# EAGLE board h2oiq (EAGLE 6.3)
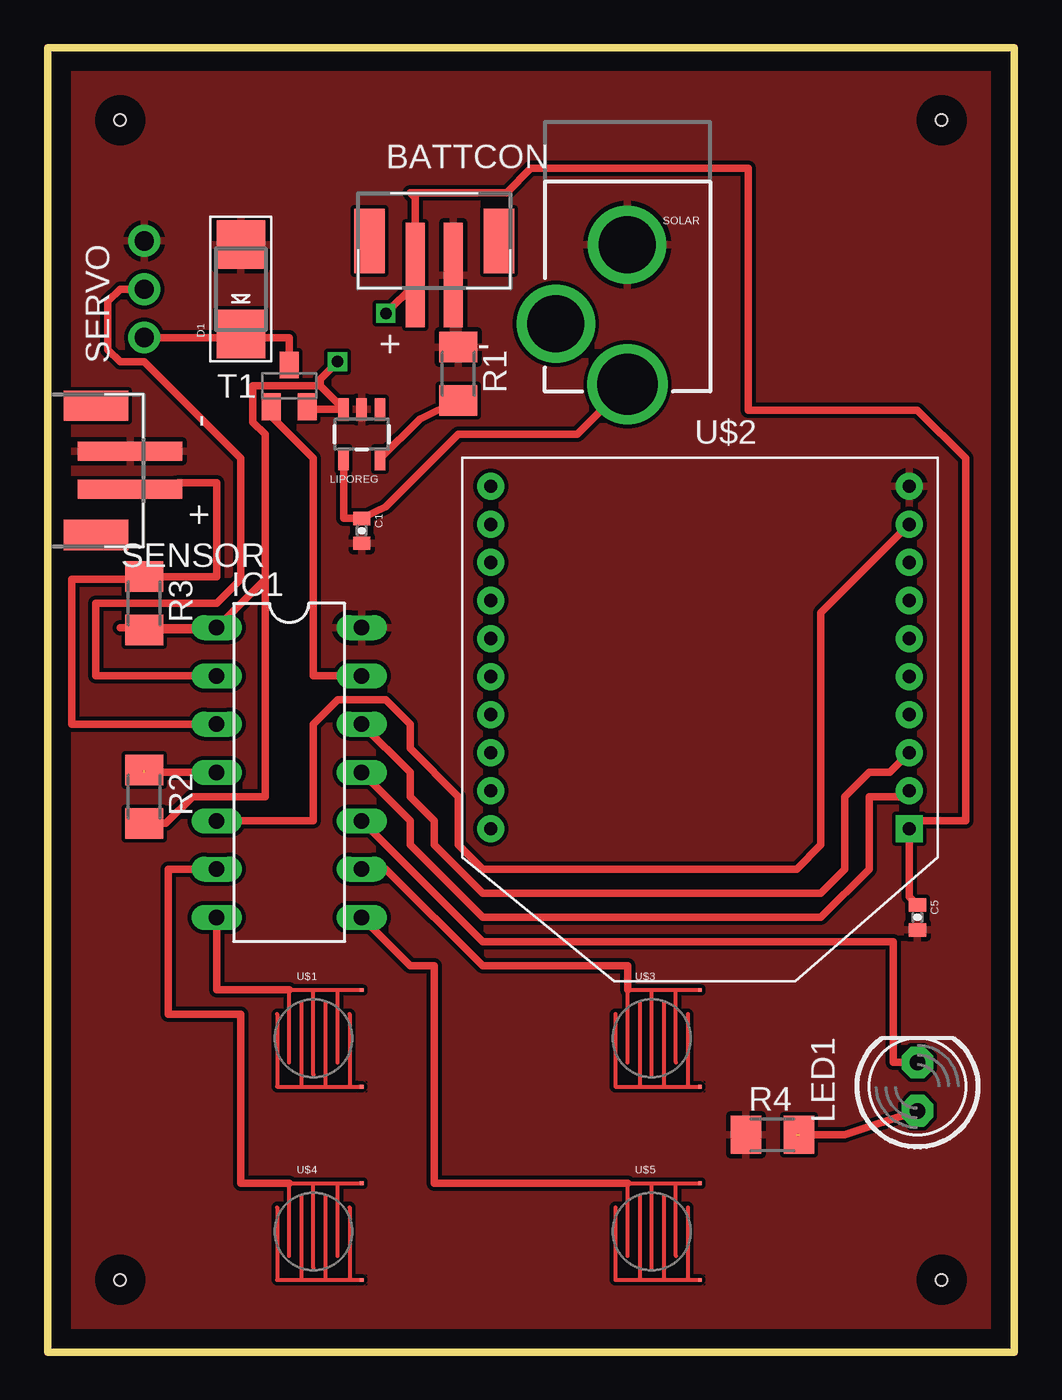
[diagram p0: board, top side]
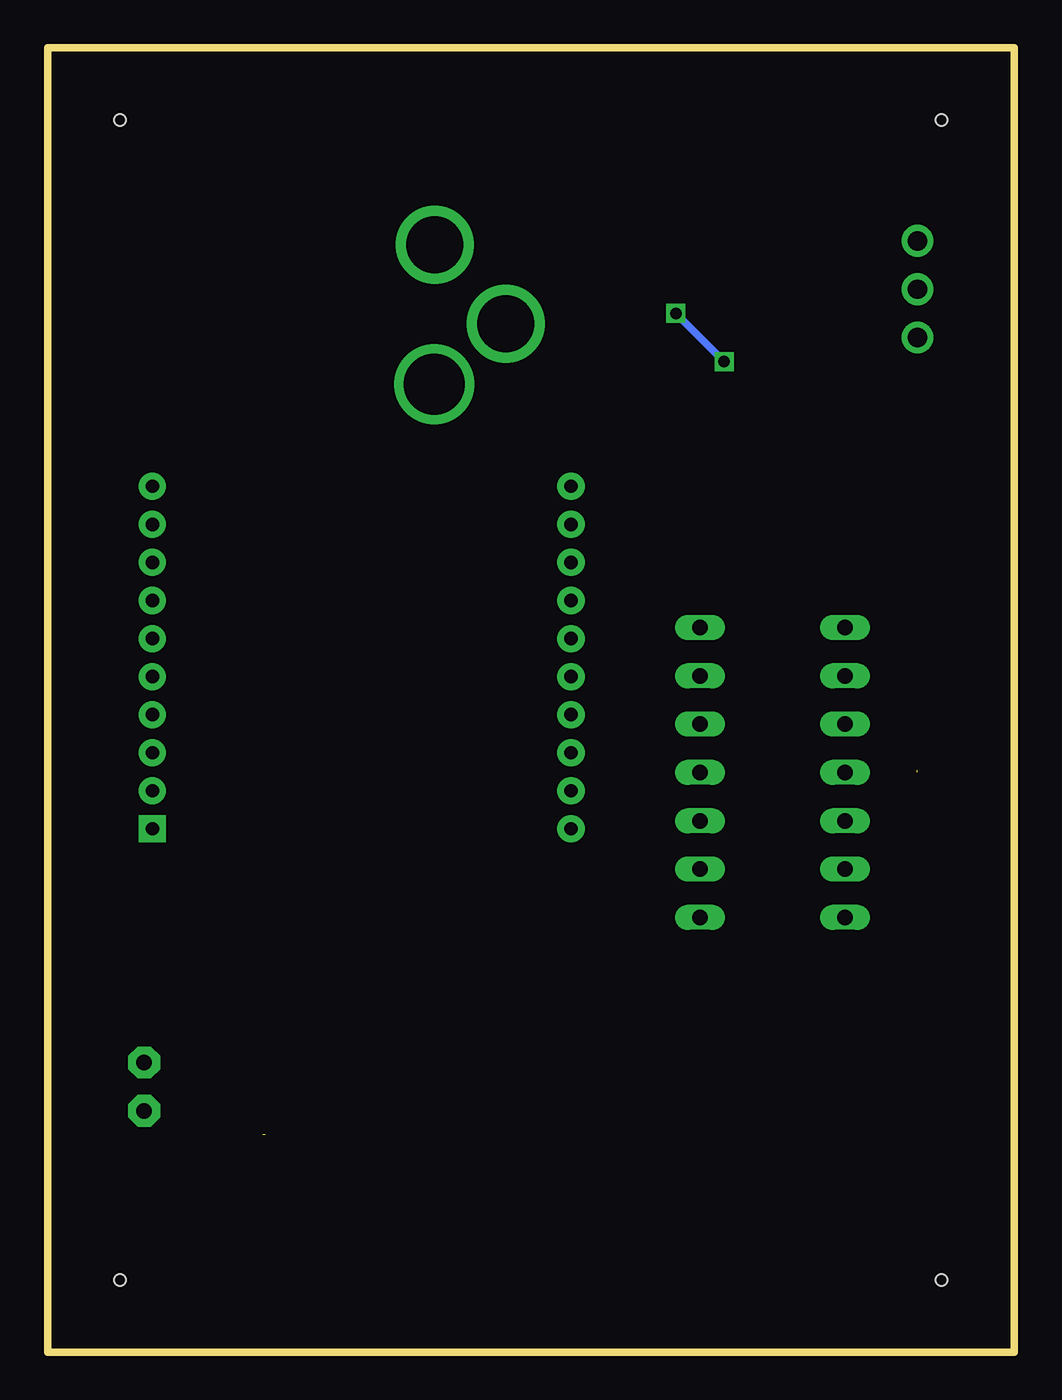
[diagram p1: board, bottom side, seen from below]

Size 50.8 x 68.58 mm. Coordinates in mm from the lower left corner, seen from the top.
Outline: 0,0 50.8,0 50.8,68.58 0,68.58 0,0
Copper layers (1*16): Top 0.035mm / dielectric 1.5mm / Bottom 0.035mm
Design rules "default": minimum track width 10mil, minimum drill 24mil, track to track 8mil, track to pad 8mil, pad to pad 8mil, via to via 8mil, smd to smd 8mil, copper to edge 40mil, drill to drill 8mil, minimum pad ring 10mil, minimum via ring 8mil, stop-mask expansion 4mil, vias tented up to drill 0mil, thermal gap 10mil
Holes 0.6 mm at 3.81,64.77 46.99,64.77 3.81,3.81 46.99,3.81

## Footprints (pad centres in the part's own frame; a part is rotated, then mirrored left to right if it is on the bottom)
JST-PH-2-SMT = smd 1 x 5.5: 1 -1,-1.8; 2 1,-1.8 | smd 1.6 x 3.4: NC1 -3.4,0; NC2 3.4,0
0402-CAP = smd 0.7 x 0.9: 1 -0.65,0; 2 0.65,0
SMADIODE = smd 2.54 x 2.54: A 2.349,0; C -2.349,0
DIL14 = drill 0.813 long: 1 -7.62,-3.81; 2 -5.08,-3.81; 3 -2.54,-3.81; 4 0,-3.81; 5 2.54,-3.81; 6 5.08,-3.81; 7 7.62,-3.81; 8 7.62,3.81; 9 5.08,3.81; 10 2.54,3.81; 11 0,3.81; 12 -2.54,3.81; 13 -5.08,3.81; 14 -7.62,3.81
LED5MM = drill 0.813 pad 1.676 octagon: A -1.27,0; K 1.27,0
SOT23-5 = smd 0.55 x 1.2: 1 -0.95,-1.3; 2 0,-1.3; 3 0.95,-1.3; 4 0.95,1.3; 5 -0.95,1.3
M1206 = smd 1.6 x 2: 1 -1.4,0; 2 1.4,0
1X03-CLEANBIG = drill 1.016 pad 1.676: 1 -2.54,0; 2 0,0; 3 2.54,0
POWER_JACK_PTH_LOCK = drill 2.997 pad 4.115: GND 0.025,6.557; GNDBREAK 3.762,10.7 | drill 3.2 pad 4.115: PWR 0,13.878
SOT23-BEC = smd 1 x 1.4: B -0.95,-1.1; C 0,1.1; E 0.95,-1.1
BUTTON-CONDUCTIVE = smd 0.203 x 0.203: 1 2.54,2.54; 2 2.54,-2.54
XBEE = drill 0.7 pad 1.422 square: 1 -11,5.5 | drill 0.7 pad 1.422: 2 -11,3.5; 3 -11,1.5; 4 -11,-0.5; 5 -11,-2.5; 6 -11,-4.5; 7 -11,-6.5; 8 -11,-8.5; 9 -11,-10.5; 10 -11,-12.5; 11 11,-12.5; 12 11,-10.5; 13 11,-8.5; 14 11,-6.5; 15 11,-4.5; 16 11,-2.5; 17 11,-0.5; 18 11,1.5; 19 11,3.5; 20 11,5.5

## Placement (x,y rotation side)
BATTCON  [JST-PH-2-SMT]  20.32,58.42 0 top
C1  4.7uF  [0402-CAP]  16.51,43.18 270 top
C5  4.7uF  [0402-CAP]  45.72,22.86 270 top
D1  [SMADIODE]  10.16,55.88 90 top
IC1  TINY24/44/84-PU  [DIL14]  12.7,30.48 270 top
LED1  [LED5MM]  45.72,13.97 90 top
LIPOREG  MCP73831  [SOT23-5]  16.51,48.26 180 top
R1  10K  [M1206]  21.59,51.44 270 top
R2  10K  [M1206]  5.08,29.21 270 top
R3  10K  [M1206]  5.08,39.37 270 top
R4  1K  [M1206]  38.1,11.43 0 top
SENSOR  [JST-PH-2-SMT]  2.54,46.35 90 top
SERVO  [1X03-CLEANBIG]  5.08,55.88 90 top
SOLAR  POWER_JACKPTH_LOCK  [POWER_JACK_PTH_LOCK]  30.48,64.77 180 top
T1  [SOT23-BEC]  12.7,50.8 0 top
U$1  BUTTON-CONDUCTIVESMD  [BUTTON-CONDUCTIVE]  13.97,16.51 0 top
U$2  XBEE  [XBEE]  34.29,33.02 180 top
U$3  BUTTON-CONDUCTIVESMD  [BUTTON-CONDUCTIVE]  31.75,16.51 0 top
U$4  BUTTON-CONDUCTIVESMD  [BUTTON-CONDUCTIVE]  13.97,6.35 0 top
U$5  BUTTON-CONDUCTIVESMD  [BUTTON-CONDUCTIVE]  31.75,6.35 0 top

## Library data of the parts
BATTCON D1 LED1 SENSOR SERVO U$2 = adafruit
C1 C5 LIPOREG SOLAR U$1 U$3-U$5 = SparkFun
IC1 = avr-7
R1-R4 = rcl
T1 = transistor

## Nets
GND: BATTCON.2 C1.2 C5.2 D1.A IC1.14 LIPOREG.2 R1.1 R4.1 SENSOR.2 SERVO.3 SOLAR.GND U$1.2 U$2.10 U$3.2 U$4.2 U$5.2
N$1: C1.1 LIPOREG.4 SOLAR.PWR
N$2: LIPOREG.5 R1.2
N$3: IC1.4 R2.1
N$4: IC1.13 T1.B
N$5: D1.C SERVO.1 T1.C
N$6: IC1.5 U$2.9
N$7: IC1.11 U$2.2
N$8: IC1.12 U$2.3
N$9: IC1.3 R3.1 SENSOR.1
N$10: IC1.2 SERVO.2
N$11: LED1.A R4.2
N$12: IC1.10 LED1.K
N$18: IC1.7 U$1.1
N$19: IC1.6 U$4.1
N$20: IC1.8 U$5.1
N$21: IC1.9 U$3.1
VCC: BATTCON.1 C5.1 IC1.1 LIPOREG.3 R2.2 R3.2 T1.E U$2.1

## Tracks (layer width: path | path; a pad name or v marks a point on that pad's centre or on a via)
GND
  pour Top: -1.27,69.85 -1.27,-1.27 50.8,-1.27 50.8,0 50.8,69.85
N$1
  Top 0.406: LIPOREG.4 15.56,43.83 C1.1 17.78,44.45 21.59,48.26 27.85,48.26 SOLAR.PWR
N$2
  Top 0.406: R1.2 19.55,49.05 LIPOREG.5
N$3  (1 unrouted)
  Top 0.406: IC1.4 5.08,30.48
N$4
  Top 0.406: T1.B 11.75,49.21 | IC1.13 13.97,35.56 13.97,46.99 11.75,49.21 | 11.43,49.21 11.75,49.21
N$5
  Top 0.406: SERVO.1 10.16,53.34 | 10.16,53.34 D1.C | 10.16,53.34 12.7,53.34 T1.C
N$6
  Top 0.406: IC1.5 13.97,27.94 13.97,33.02 15.24,34.29 17.78,34.29 19.05,33.02 19.05,31.75 21.59,29.21 21.59,26.67 22.86,25.4 39.37,25.4 40.64,26.67 40.64,38.87 U$2.9
N$7
  Top 0.406: U$2.2 44.98,29.21 43.18,29.21 43.18,25.4 40.64,22.86 22.86,22.86 19.05,26.67 19.05,27.94 IC1.11
N$8
  Top 0.406: IC1.12 19.05,30.48 19.05,29.21 20.32,27.94 20.32,26.67 22.86,24.13 40.64,24.13 41.91,25.4 41.91,29.21 43.18,30.48 44.25,30.48 U$2.3
N$9
  Top 0.406: SENSOR.1 6.88,45.72 8.89,45.72 8.89,40.77 R3.1 4.95,40.64 1.27,40.64 1.27,33.02 IC1.3
N$10
  Top 0.406: SERVO.2 3.81,55.88 3.17,55.24 3.17,52.7 3.81,52.07 5.08,52.07 10.16,46.99 10.16,40.64 8.89,39.37 2.54,39.37 2.54,35.56 IC1.2
N$11  (1 unrouted)
  Top 0.406: LED1.A 41.91,11.43 39.37,11.43
N$12
  Top 0.406: LED1.K 44.45,15.24 44.45,21.59 22.86,21.59 IC1.10
N$18
  Top 0.406: 12.7,19.05 8.89,19.05 IC1.7
N$19
  Top 0.406: 12.7,8.89 10.16,8.89 10.16,17.78 6.35,17.78 6.35,25.4 IC1.6
N$20
  Top 0.406: 30.48,8.89 20.32,8.89 20.32,20.32 19.05,20.32 IC1.8
N$21
  Top 0.406: IC1.9 17.78,25.4 22.86,20.32 30.48,20.32 30.48,19.05
VCC  (via drill 0.6)
  Top 0.406: LIPOREG.3 13.65,49.56 T1.E | LIPOREG.3 14.61,49.56 | R3.2 8.76,37.97 IC1.1 | C5.1 45.29,23.94 U$2.1 45.71,27.94 48.26,27.94 48.26,46.99 45.72,49.53 36.83,49.53 36.83,62.23 25.4,62.23 24.13,60.96 19.05,60.96 19.32,60.69 BATTCON.1 19.32,56.15 v17.78,54.61 | IC1.1 3.81,38.1 | IC1.1 11.43,40.64 | 11.43,40.64 11.43,48.26 10.79,48.9 10.79,50.8 14.32,50.8 | 14.32,50.8 LIPOREG.3 | R2.2 6.22,27.81 7.62,29.21 11.43,29.21 11.43,40.64 | 14.32,50.8 14.32,51.15 v15.24,52.07
  Bottom 0.406: v17.78,54.61 v15.24,52.07